# Altium PCB AB32VG1_Prougen_Circuit_V02.PcbDoc (part 2 of 3)
Units mm, origin at the board's own origin, x right, y up, seen from the top; angles counter-clockwise.
Board outline 90.13 x 60.13 mm, 4 copper layers (Top Layer, GND, POWER, Bottom Layer); 102 components, 91 nets, 357 pads, 386 vias.
Unrouted connection lines stored in the file: 1.
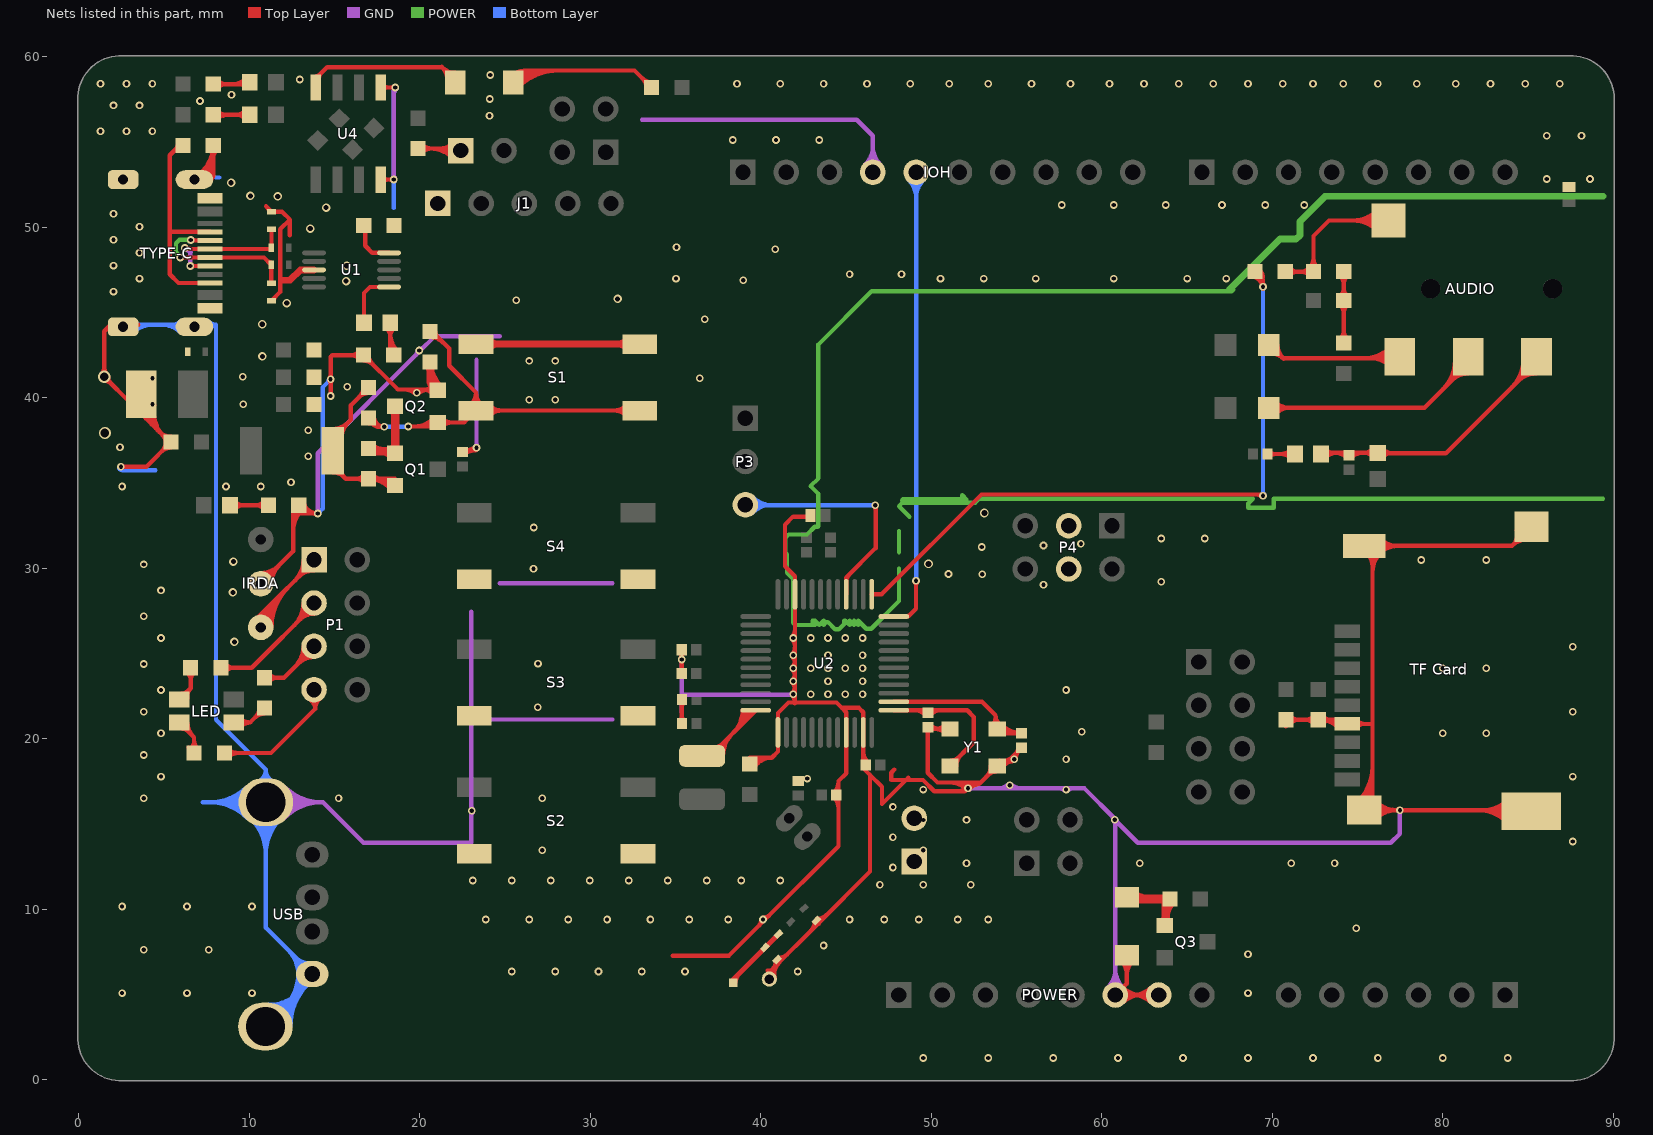
[diagram p4: the nets of this part, all layers, seen from the top]

## Via types
v1: diameter 0.45, hole 0.25, Top Layer to Bottom Layer, tented both sides, 359 vias
v2: diameter 0.5, hole 0.3, Top Layer to Bottom Layer, tented both sides, 14 vias
v3: diameter 0.508, hole 0.356, Top Layer to Bottom Layer, tented both sides, 7 vias
v4: diameter 0.711, hole 0.508, Top Layer to Bottom Layer, tented both sides, 6 vias

## Nets (pads, with @x,y where several pads share a name; then routed paths per layer and width w, separated by ;. In a path a pad name is that pad's centre, name@x,y a point inside that pad or via, vN(x,y) a via of type N, cw(c..) or ccw(c..) an arc to the next point about the centre after c; other vN are vias at no path point) (continued)
GND: "TF Card.6" "TF Card.10" BT-ANT1.2 C1.1 C2.1 C3.2 C4.2 C5.2 C6.1 C7.2 C10.2 C11.1 C12.2 C13.2 C14.2 C15.2 C16.2 C17.2 C18.2 C20.1 C21.1 CE1.2 D7.2 ED1.2 ED2.2 ED3.2 IOH.4 IRDA.2 J1.1 J2.2 J4.2 J19.1 J19.2 L2.1 L3.2 P4.3 P4.4 POWER.6 POWER.7 Q2.2 R2.1 R9.1 R10.1 R12.1 S1.1 S2.2 S3.2 S4.2 TYPE-C.A1 TYPE-C.A12 TYPE-C.B1 TYPE-C.B12 TYPE-C.GND U1.3 U2.13 U2.21 U2.23 U2.46 U4.4 U4.5 USB.4 USB.5 USB.6 Y1.2 Y1.4 | length 729.5
  Top Layer w0.254: v4@1.328,41.392 ccw(c0.938,41.782) 1.49,41.782 ccw(c2.042,41.782) v4@1.652,41.392 ; 1.489,43.899 cw(c1.908,43.479) TYPE-C.GND@2.174,44.009 ; v4@1.49,41.002 cw(c1.49,40.45) 1.88,40.84 cw(c2.27,41.23) v4@1.718,41.23 ; v1(2.47,35.96) 3.971,35.96 C12.2@5.411,37.4 5.32,37.4 3.093,39.627 v4(1.49,41.23) 1.49,43.9 1.87,44.28 2.6,44.28 3.5,44.28 ; v1@2.539,35.891 cw(c2.707,35.723) 2.707,35.96 cw(c2.707,36.197) v1@2.539,36.029 ; CE1.2@3.665,39.692 ccw(c4.714,39.511) 3.961,38.759 ; CE1.2@3.916,39.649 ccw(c5.305,39.409) 4.308,38.412 ; CE1.2@4.166,39.606 ccw(c5.897,39.307) 4.655,38.065 ; CE1.2@4.416,39.563 ccw(c6.488,39.205) C12.2@5.001,37.719 ; 4.714,38.006 ccw(c5.411,38.704) C12.2@5.411,37.717 ; 4.933,37.787 cw(c4.547,37.4) 5.094,37.4 cw(c4.327,37.4) 4.869,36.858 cw(c5.411,36.316) C12.2@5.411,37.082 ; TYPE-C.GND@7.072,53.135 ccw(c5.787,54.8) R9.1@7.89,54.8 ; TYPE-C.GND@7.227,52.934 ccw(c6.186,54.283) 7.89,54.283 ; TYPE-C.GND@7.382,52.733 ccw(c6.584,53.766) 7.89,53.766 ; TYPE-C.GND@7.537,52.532 ccw(c6.983,53.25) 7.89,53.25 ; TYPE-C.GND@7.564,52.666 7.89,52.992 R9.1@7.89,54.8 ; R9.1@7.665,54.575 cw(c7.123,54.033) 7.89,54.033 cw(c8.657,54.033) R9.1@8.115,54.575 ; R9.1@7.89,55 R9.1@7.89,54.8 ; IRDA.2@10.32,28.74 IRDA.2@10.673,29.093 12.572,30.992 12.572,33.21 12.9,33.21 ; IRDA.2@10.673,29.462 ccw(c10.673,30.353) 11.303,29.723 ccw(c11.933,29.093) IRDA.2@11.042,29.093 ; IRDA.2@10.673,29.716 ccw(c10.673,31.22) 11.737,30.157 ccw(c12.8,29.093) IRDA.2@11.296,29.093 ; 10.978,51.23 ED3.2@11.3,50.908 11.922,50.908 12.38,50.45 ; 11.083,51.125 cw(c10.866,50.908) ED3.2@11.173,50.908 ; ED2.2@11.262,45.73 ED2.2@11.3,45.692 11.81,46.202 11.81,49.88 12.38,50.45 ; ED2.2@11.427,45.692 cw(c11.734,45.692) 11.517,45.909 ; 12.38,49.53 12.38,50.45 ; 12.572,32.142 cw(c14.458,32.142) R10.1@13.125,33.475 ; 12.572,32.755 cw(c13.845,32.755) R10.1@12.945,33.655 ; R10.1@12.719,33.641 ccw(c13.312,33.833) 13.312,33.21 ; R10.1@12.9,33.7 13.39,33.21 ; R10.1@12.923,33.383 cw(c12.968,32.788) 13.39,33.21 ; R10.1@12.96,33.72 ccw(c13.661,33.946) 13.661,33.21 ; R10.1@13.202,33.798 ccw(c14.01,34.059) v1(14.01,33.21) 13.39,33.21 ; R10.1@13.217,33.677 ccw(c13.812,33.632) 13.39,33.21 ; v1@13.941,33.141 ccw(c13.773,32.973) 13.773,33.21 ccw(c13.773,33.447) v1@13.941,33.279 ; v1@14.701,40.169 ccw(c14.533,40.337) 14.77,40.337 ccw(c15.007,40.337) v1@14.839,40.169 ; v1@14.701,41.011 cw(c14.533,40.843) 14.77,40.843 cw(c15.007,40.843) v1@14.839,41.011 ; v1@14.701,41.149 ccw(c14.533,41.317) 14.77,41.317 ccw(c15.007,41.317) v1@14.839,41.149 ; v1(14.77,40.1) v1(14.77,41.08) 14.77,42.4 14.87,42.5 R2.1@16.7,42.5 18.716,40.484 19.829,40.484 21.016,40.484 Q2.2@21.05,40.484 ; R2.1@16.475,42.275 ccw(c15.933,41.733) 15.933,42.5 ccw(c15.933,43.267) R2.1@16.475,42.725 ; R2.1@16.7,42.182 cw(c16.7,41.416) 17.242,41.958 cw(c17.784,42.5) R2.1@17.017,42.5 ; U4.4@17.71,52.8 v1(18.48,52.8) ; U4.5@17.71,58.2 v1(18.56,58.2) ; U4.4@17.832,52.678 cw(c18.128,52.382) 18.128,52.8 cw(c18.128,53.218) U4.4@17.832,52.922 ; U4.5@17.832,58.078 cw(c18.128,57.782) 18.128,58.2 cw(c18.128,58.618) U4.5@17.832,58.322 ; v1@18.411,52.731 ccw(c18.243,52.563) 18.243,52.8 ccw(c18.243,53.037) v1@18.411,52.869 ; v1@18.491,58.131 ccw(c18.323,57.963) 18.323,58.2 ccw(c18.323,58.437) v1@18.491,58.269 ; 19.134,40.484 cw(c19.134,39.599) v1@19.76,40.225 ; v1@19.898,40.225 cw(c20.524,39.599) 20.524,40.484 ; 20.163,40.484 cw(c20.163,39.588) Q2.2@20.797,40.222 ; 20.327,40.484 ccw(c20.327,41.148) Q2.2@20.797,40.678 ; C13.2@22.511,36.907 23.286,36.907 v1(23.33,37.07) ; C13.2@22.647,36.703 cw(c23.141,36.209) 23.141,36.907 ; C13.2@22.7,36.907 ccw(c22.7,37.7) v1@23.261,37.139 ; 34.84,7.28 38.14,7.28 40.195,9.335 44.56,13.7 44.56,16.7 44.56,17.517 45.01,17.967 U2.21@45.01,20.37 45.01,21.56 44.76,21.81 ; C16.2@35.243,23.967 ccw(c34.947,24.263) 35.365,24.263 ccw(c35.783,24.263) C16.2@35.487,23.967 ; C15.2@35.243,25.073 cw(c34.947,24.777) 35.365,24.777 cw(c35.783,24.777) C15.2@35.487,25.073 ; C18.2@35.253,21.047 ccw(c34.981,21.319) 35.365,21.319 ; C17.2@35.253,22.153 cw(c34.981,21.881) 35.365,21.881 ; v1@35.291,24.581 cw(c35.111,24.401) 35.365,24.401 ; v1@35.291,24.719 ccw(c35.111,24.899) C15.2@35.365,24.899 ; C18.2@35.365,21.02 35.365,22.3 C17.2@35.365,22.42 ; 35.365,21.367 ccw(c35.817,21.367) C18.2@35.497,21.047 ; 35.365,21.833 cw(c35.817,21.833) C17.2@35.497,22.153 ; C16.2@35.365,23.82 35.365,24.65 C15.2@35.365,25.22 ; C11.1@39.2,18.613 cw(c39.712,18.279) C11.1@39.712,18.89 ; C11.1@39.36,18.89 40.65,18.89 ; C11.1@39.413,18.474 cw(c40.181,17.973) 40.181,18.89 ; C11.1@39.626,18.335 cw(c40.65,17.667) 40.65,18.89 ; 39.876,9.016 ccw(c39.493,9.398) v1@40.034,9.398 ; v1@40.132,9.496 ccw(c40.132,10.037) 40.514,9.654 ; 40.401,6.404 40.501,6.404 40.604,6.404 ; BT-ANT1.2@40.563,5.917 cw(c41.27,6.053) 40.761,6.561 ; 40.745,6.545 ccw(c40.433,6.856) L3.2@40.859,6.968 ; BT-ANT1.2@40.813,5.965 cw(c41.838,6.162) 41.1,6.9 40.604,6.404 ; L3.2@41.022,6.888 ccw(c41.022,7.046) 41.134,6.934 ; L3.2@41.022,7.142 ccw(c41.022,7.914) 41.568,7.368 ; 41.058,6.858 ccw(c40.929,6.987) L3.2@41.105,7.033 ; v1@41.841,22.537 cw(c41.453,22.151) 42,22.15 ; v1@41.841,23.299 cw(c41.451,22.91) 42.001,22.909 ; v1@41.841,24.061 cw(c41.448,23.669) 42.002,23.668 ; v1@41.841,24.823 cw(c41.445,24.428) 42.004,24.427 ; v1@41.841,25.839 cw(c41.441,25.44) 42.005,25.44 ; v1@41.841,22.675 ccw(c41.455,23.063) 42.002,23.062 ; v1@41.841,23.437 ccw(c41.452,23.827) 42.003,23.827 ; v1@41.841,24.199 ccw(c41.449,24.592) 42.004,24.591 ; v1@41.841,24.961 ccw(c41.446,25.357) 42.005,25.356 ; v1@41.841,25.977 ccw(c41.442,26.377) 42.007,26.376 ; 42,22.07 42,22.13 ; 42.932,8.732 ccw(c42.387,9.278) L2.1@43.158,9.278 ; J2.2@42.98,32.87 42.835,33.015 42.82,33.03 41.9,33.03 41.42,32.55 41.42,30.12 42.01,29.53 U2.46@42.01,28.47 42.006,25.908 42.004,24.892 42.003,24.13 42.002,23.368 42.001,22.606 42,22.13 ; L2.1@43.255,9.303 cw(c43.238,9.142) 43.4,9.142 ; L2.1@43.301,9.372 cw(c43.175,9.186) 43.4,9.186 ; L2.1@43.322,9.188 ccw(c43.322,9.346) 43.434,9.234 ; L2.1@43.322,9.442 ccw(c43.322,10.213) 43.868,9.668 ; 43.366,9.166 ccw(c43.254,9.278) L2.1@43.412,9.278 ; C7.2@44.303,16.553 cw(c43.681,15.931) 44.56,15.931 ; C7.2@44.303,16.847 ccw(c43.681,17.469) 44.56,17.469 ; 46.01,19.287 ccw(c46.957,19.287) C6.1@46.287,18.617 ; 47.835,18.195 47.65,18.01 47.65,17.58 48.52,17.58 ; 48.66,17.72 48.52,17.58 ; C2.1@49.678,20.553 cw(c49.382,20.257) 49.8,20.257 cw(c50.218,20.257) C2.1@49.922,20.553 ; C2.1@49.947,20.797 ccw(c50.49,21.34) 50.49,20.573 ; Y1.2@50.824,20.344 ccw(c50.273,19.793) 50.273,20.573 ccw(c50.273,21.352) Y1.2@50.824,20.801 ; 51.103,17.43 cw(c51.103,16.033) v1@52.091,17.021 ; Y1.2@51.103,20.573 49.902,20.573 C2.1@49.8,20.675 49.8,18 50.37,17.43 52.16,17.43 52.9,17.43 ; 51.513,16.92 ccw(c51.513,17.737) v1@52.091,17.159 ; 51.716,17.43 cw(c51.716,16.646) v1@52.27,17.2 ; v1@52.023,17.165 cw(c52.471,16.92) 52.471,17.43 ; v1@52.03,17.176 cw(c52.344,16.969) 52.344,17.345 ; v1@52.242,17.036 cw(c52.815,16.659) 52.815,17.345 ; v1@52.246,17.043 cw(c52.9,16.684) 52.9,17.43 ; v1@52.258,17.09 cw(c52.543,17.09) 52.341,17.291 ; 53.235,17.765 ccw(c52.598,18.402) Y1.4@53.499,18.402 ; 53.356,17.886 cw(c53.822,17.42) Y1.4@53.822,18.079 ; Y1.4@53.939,18.469 ccw(c54.066,18.964) 54.428,18.603 ; Y1.4@54.002,18.715 ccw(c54.195,19.465) v1@54.742,18.917 ; Y1.4@54.282,18.457 cw(c54.864,17.875) v1@54.864,18.698 ; v1@54.962,18.796 cw(c55.785,18.796) C1.1@55.203,19.378 ; 54.962,19.137 ccw(c54.624,19.475) C1.1@55.102,19.475 ; C1.1@55.022,19.197 cw(c55.275,18.945) C1.1@55.275,19.302 ; C1.1@55.3,19.475 v1@54.742,18.918 ; POWER.6@61.061,4.709 cw(c61.691,4.079) 61.691,4.97 ; POWER.6@61.061,5.231 ccw(c61.691,5.861) 61.691,4.97 ; D7.2@61.15,6.971 cw(c60.381,6.202) 61.468,6.202 ; POWER.6@61.241,4.529 cw(c62.304,3.466) 62.304,4.97 cw(c62.304,6.474) POWER.6@61.241,5.411 ; 61.468,6.124 cw(c62.665,6.124) D7.2@61.818,6.971 ; D7.2@61.468,7.215 61.468,5.638 POWER.6@60.8,4.97 POWER.7@63.34,4.97 ; POWER.7@62.899,4.529 ccw(c61.836,3.466) 61.836,4.97 ccw(c61.836,6.474) POWER.7@62.899,5.411 ; POWER.7@63.079,4.709 ccw(c62.449,4.079) 62.449,4.97 ccw(c62.449,5.861) POWER.7@63.079,5.231 ; C20.1@70.8,20.73 70.991,20.921 71.181,21.111 C21.1@72.7,21.111 74.159,21.111 74.4,20.87 75.87,20.87 75.88,20.88 ; C20.1@71.025,20.886 cw(c71.567,20.344) 71.567,21.111 cw(c71.567,21.878) C20.1@71.025,21.336 ; C21.1@72.475,20.886 ccw(c71.933,20.344) 71.933,21.111 ccw(c71.933,21.878) C21.1@72.475,21.336 ; C21.1@72.809,21.111 cw(c72.809,19.629) 73.857,20.677 ; C21.1@72.925,20.886 cw(c73.467,20.344) 73.467,21.111 cw(c73.467,21.878) C21.1@72.925,21.336 ; 73.422,21.111 cw(c73.422,20.242) 74.037,20.857 ; 74.943,20.677 cw(c75.409,20.211) 75.409,20.87 cw(c75.409,21.529) 74.943,21.063 ; 75.039,16.323 ccw(c73.008,18.354) 75.88,18.354 ; 75.218,16.144 ccw(c73.621,17.741) 75.88,17.741 ; 75.398,15.964 ccw(c74.234,17.128) 75.88,17.128 ; 75.545,30.907 cw(c74.736,30.098) 75.88,30.098 ; 75.88,16.761 ccw(c76.499,16.761) 76.061,16.323 ccw(c77.295,17.557) 77.295,15.812 ccw(c77.295,14.067) 76.061,15.301 ; 75.88,29.76 cw(c77.502,29.76) 76.355,30.907 cw(c77.333,29.929) 77.333,31.312 cw(c77.333,32.695) 76.355,31.717 ; 75.88,30.373 cw(c76.889,30.373) 76.176,31.086 cw(c76.72,30.542) 76.72,31.312 cw(c76.72,32.082) 76.176,31.538 ; 75.882,15.48 cw(c76.682,14.68) 76.682,15.812 cw(c76.682,16.944) 75.882,16.144 ; 77.249,15.812 cw(c77.249,15.569) v1@77.421,15.741 ; 77.258,15.812 ccw(c77.258,16.042) v1@77.421,15.879 ; v1@77.559,15.741 cw(c77.731,15.569) 77.731,15.812 ; v1@77.559,15.879 ccw(c77.722,16.042) 77.722,15.812 ; 82.03,15.812 cw(c82.03,13.221) 83.862,15.053 ; 82.372,15.812 ccw(c82.372,17.919) 83.862,16.429 ; 82.643,15.812 cw(c82.643,13.834) 84.042,15.233 ; 82.986,15.812 ccw(c82.986,17.305) 84.042,16.249 ; 83.256,15.812 cw(c83.256,14.447) 84.221,15.412 ; 84.354,32.238 cw(c83.482,32.001) 84.121,31.362 cw(c84.889,30.594) 85.012,31.673 ; 84.431,31.672 ccw(c83.969,32.133) 84.599,32.305 ; 84.493,31.734 cw(c84.965,31.262) 85.041,31.925 ; 85.2,15.741 85.129,15.812 77.49,15.812 75.4,15.812 75.88,16.292 75.88,20.88 ; 85.2,32.441 84.071,31.312 75.4,31.312 75.88,30.832 75.88,20.88 ; 12.9,33.21 ccw(c12.681,33.21) 12.77,33.41 cw(c12.681,33.21) 12.9,33.21 ; 12.9,33.21 cw(c13.119,33.21) 13.03,33.41 ccw(c13.119,33.21) 12.9,33.21 ; 12.9,33.21 13.39,33.21 ; 40.604,6.404 43.4,9.2 46.41,12.21 46.41,17.88 ; 40.65,18.89 41.01,19.25 U2.13@41.01,20.37 41.01,21.51 41.63,22.13 42,22.13 ; 42,22.13 44.44,22.13 44.76,21.81 ; 44.76,21.81 45.76,21.81 46.01,21.56 U2.23@46.01,20.37 46.01,18.47 46.01,18.28 46.41,17.88 ; 46.41,17.88 47.11,17.18 47.11,16.17 48.52,17.58 ; 48.52,17.58 49.52,17.58 50.18,16.92 51.97,16.92 52.15,17.1 52.395,17.345 52.815,17.345 ; 52.815,17.345 52.9,17.43 ; 52.9,17.43 Y1.4@53.872,18.402 54.227,18.402 v1@54.742,18.918
  Top Layer w0.4: 11.881,46.899 12.391,46.899 12.992,47.5 U1.3@13.8,47.5 ; R12.1@20.427,41.927 cw(c20.01,41.51) 20.6,41.51 cw(c21.19,41.51) R12.1@20.773,41.927 ; 20.6,41.114 ccw(c21.689,41.114) Q2.2@20.919,40.344 ; R12.1@20.6,42.08 ccw(c22.655,42.08) Q2.2@21.202,40.627 ; R12.1@20.6,42.1 20.6,40.9 21.016,40.484 Q2.2@21.05,40.45 ; S1.1@23.3,43.15 S1.1@32.9,43.15 ; S1.1@24.007,42.887 cw(c24.641,42.253) 24.641,43.15 cw(c24.641,44.047) S1.1@24.007,43.413 ; S1.1@32.193,42.887 ccw(c31.559,42.253) 31.559,43.15 ccw(c31.559,44.047) S1.1@32.193,43.413
  GND w0.254: USB.5@10.969,16.273 14.327,16.273 16.7,13.9 23.028,13.9 23.028,15.771 23.028,27.456 ; USB.5@11.709,15.732 cw(c13.015,14.426) 13.015,16.273 cw(c13.015,18.12) USB.5@11.709,16.814 ; USB.5@11.889,15.552 cw(c13.629,13.813) 13.629,16.273 cw(c13.629,18.733) USB.5@11.889,16.994 ; USB.5@12.069,15.373 cw(c14.242,13.2) 14.242,16.273 cw(c14.242,19.346) USB.5@12.069,17.173 ; v1@13.941,33.279 ccw(c13.773,33.447) 14.01,33.447 ccw(c14.247,33.447) v1@14.079,33.279 ; v1(14.01,33.21) 14.01,36.75 20.004,42.744 20.86,43.6 24.7,43.6 ; v1@18.411,52.869 ccw(c18.243,53.037) 18.48,53.037 ccw(c18.717,53.037) v1@18.549,52.869 ; v1(18.48,52.8) 18.48,58.12 v1(18.56,58.2) ; 18.48,57.77 cw(c18.99,57.77) v1@18.629,58.131 ; 19.755,42.495 ccw(c19.474,42.777) v1@19.872,42.777 ; v1@19.97,42.875 ccw(c19.97,43.273) 20.252,42.992 ; 23.028,15.467 cw(c23.36,15.467) v1@23.125,15.702 ; 23.028,16.075 ccw(c23.36,16.075) v1@23.125,15.84 ; 23.036,21.128 31.304,21.128 ; v1@23.261,37.139 ccw(c23.093,37.307) 23.33,37.307 ccw(c23.567,37.307) v1@23.399,37.139 ; v1(23.33,37.07) 23.33,42.23 ; 24.7,29.128 31.304,29.128 ; 33.04,56.31 45.63,56.31 46.576,55.364 IOH.4@46.576,53.23 ; v1@35.291,24.581 cw(c35.099,24.389) 35.37,24.389 ; v1(35.36,24.65) 35.37,24.64 35.37,22.64 ; 35.37,21.56 35.37,22.64 ; 41.611,22.58 ccw(c41.611,22.905) v1@41.841,22.675 ; v1@42.01,22.58 41.91,22.58 35.43,22.58 35.37,22.64 ; IOH.4@46.135,53.671 ccw(c45.072,54.734) 46.576,54.734 ccw(c48.08,54.734) IOH.4@47.017,53.671 ; IOH.4@46.315,53.491 ccw(c45.685,54.121) 46.576,54.121 ccw(c47.467,54.121) IOH.4@46.837,53.491 ; v1@52.229,17.021 cw(c52.397,16.853) 52.397,17.09 cw(c52.397,17.327) v1@52.229,17.159 ; 53.934,17.09 ccw(c53.934,17.948) v1@54.541,17.341 ; v1@54.61,17.09 v1(52.16,17.09) 57.912,17.09 58.99,17.09 60.8,15.28 60.8,15.25 v1@60.8,15.22 ; v1@54.679,17.341 ccw(c55.286,17.948) 55.286,17.09 ; 57.502,17.09 cw(c57.502,16.608) v1@57.843,16.949 ; v1@57.981,16.949 cw(c58.322,16.608) 58.322,17.09 ; POWER.6@60.359,5.411 ccw(c59.296,6.474) 60.8,6.474 ccw(c62.304,6.474) POWER.6@61.241,5.411 ; POWER.6@60.539,5.231 ccw(c59.909,5.861) 60.8,5.861 ccw(c61.691,5.861) POWER.6@61.061,5.231 ; 60.56,15.52 cw(c60.291,15.25) v1@60.672,15.25 ; v1@60.701,15.181 cw(c60.461,14.941) 60.8,14.941 ; v1@60.77,15.152 cw(c60.77,14.915) 60.937,15.083 cw(c61.105,15.25) v1@60.868,15.25 ; v1(60.77,15.25) v1@60.8,15.22 ; POWER.6@60.8,4.97 v1@60.8,15.22 ; v1@77.421,15.741 cw(c77.253,15.573) 77.49,15.573 cw(c77.727,15.573) v1@77.559,15.741 ; v1(77.49,15.81) 77.49,14.43 76.96,13.9 62.12,13.9 v1@60.8,15.22
  POWER w0.254: 48.11,29.987 48.11,28.08 46.482,26.452 46.192,26.452 45.72,26.924 45.72,26.67 45.466,26.924 45.466,26.67 45.212,26.924 45.212,26.67 44.958,26.924 44.894,26.924 44.894,26.734 44.576,26.416 44.374,26.416 43.94,26.85 43.868,26.85 43.688,26.67 43.688,26.924 43.434,26.67 43.18,26.924 43.034,26.924 43.034,26.816 43.18,26.67 42.03,26.67 41.89,26.81 41.89,29.377 41.537,29.73 41.537,30.83 41.44,30.927 41.44,31.786 41.634,31.98 42.71,31.98 43.168,32.438 43.348,32.438 43.38,32.47 43.38,34.363 42.926,34.817 43.38,35.271 43.38,43.126 46.504,46.25 67.4,46.25 67.4,46.24 67.62,46.24 67.723,46.343 67.493,46.343 ; 48.11,30.935 48.11,32.187 ; 48.73,33.02 48.11,33.64 48.32,33.85 52.07,33.85 ; 51.816,34.036 51.816,34.29 52.07,34.036 52.07,33.85 ; 89.408,34.08 70.089,34.08 70.089,33.543 68.595,33.543 68.595,33.797 68.878,34.08 52.808,34.08 52.578,33.85 52.07,33.85
  POWER w0.3: 48.305,33.985 48.356,34.036 51.816,34.036
  POWER w0.4: 67.493,46.343 70.457,49.307 71.405,49.307 71.628,49.53 71.628,50.348 73.096,51.816 89.408,51.816
  Bottom Layer w0.254: v1@2.36,35.85 ccw(c2.622,36.112) 2.622,35.741 ; v1(2.47,35.96) 2.689,35.741 4.5,35.741 ; v1@2.539,36.029 ccw(c3.235,36.725) 3.235,35.741 ; TYPE-C.GND@3.069,44.041 cw(c3.648,43.462) 3.648,44.28 ; TYPE-C.GND@3.249,43.861 cw(c4.261,42.849) 4.261,44.28 ; TYPE-C.GND@3.249,44.459 ccw(c3.682,44.892) 3.682,44.28 ; 3.5,44.28 6.78,44.28 8.05,44.28 ; 4.919,44.28 cw(c4.919,42.849) TYPE-C.GND@5.931,43.861 ; 5.498,44.28 ccw(c5.498,44.892) TYPE-C.GND@5.931,44.459 ; 5.532,44.28 cw(c5.532,43.462) TYPE-C.GND@6.11,44.041 ; 7.268,16.273 USB.5@10.969,16.273 ; TYPE-C.GND@7.632,44.456 ccw(c8.05,44.864) 8.05,44.28 ; TYPE-C.GND@7.737,44.044 cw(c8.05,43.954) 8.05,44.28 ; 8.05,52.92 8.239,52.92 ; USB.5@9.868,15.373 ccw(c7.695,13.2) 7.695,16.273 ccw(c7.695,19.346) USB.5@9.868,17.173 ; USB.5@10.048,15.552 ccw(c8.308,13.813) 8.308,16.273 ccw(c8.308,18.733) USB.5@10.048,16.994 ; USB.5@10.068,15.373 cw(c7.895,13.2) 10.969,13.2 cw(c14.042,13.2) USB.5@11.869,15.373 ; USB.5@10.228,15.732 ccw(c8.922,14.426) 8.922,16.273 ccw(c8.922,18.12) USB.5@10.228,16.814 ; USB.5@10.248,15.552 cw(c8.508,13.813) 10.969,13.813 cw(c13.429,13.813) USB.5@11.689,15.552 ; USB.5@10.428,15.732 cw(c9.122,14.426) 10.969,14.426 cw(c12.815,14.426) USB.5@11.509,15.732 ; USB.5@10.474,17.446 ccw(c10.16,18.191) 10.969,18.191 ; USB.5@10.573,17.212 ccw(c10.321,17.809) 10.969,17.809 ccw(c11.616,17.809) USB.5@11.365,17.212 ; USB.6@10.944,3.123 13.694,5.873 USB.4@13.694,6.198 10.969,8.923 USB.5@10.969,16.273 ; USB.6@11.144,3.888 ccw(c11.144,5.252) 12.108,4.288 ; USB.6@11.144,4.142 ccw(c11.144,6.119) 12.542,4.721 ; USB.6@11.144,4.396 ccw(c11.144,6.986) 12.975,5.155 ; USB.5@11.463,17.446 cw(c11.778,18.191) 10.969,18.191 ; USB.6@11.655,3.123 cw(c13.371,3.123) 12.157,4.337 ; USB.6@11.909,3.123 cw(c14.238,3.123) 12.591,4.77 ; 12.055,4.234 ccw(c10.091,6.198) 12.868,6.198 ccw(c10.875,6.198) 12.284,7.607 ; USB.6@12.163,3.123 cw(c15.105,3.123) 13.025,5.204 ; USB.6@12.417,3.123 cw(c15.973,3.123) USB.4@13.458,5.638 ; 12.488,4.668 ccw(c10.958,6.198) 13.122,6.198 ccw(c11.742,6.198) 12.718,7.174 ; 12.613,16.273 USB.5@10.969,16.273 ; 12.744,7.147 ccw(c13.503,7.906) USB.4@13.503,6.833 ; 12.922,5.101 ccw(c11.825,6.198) USB.4@13.376,6.198 ; v1(14.01,33.21) 14.3,33.5 14.3,40.61 v1(14.77,41.08) ; v1@14.01,33.308 ccw(c14.01,33.545) 14.177,33.377 ccw(c14.345,33.21) v1@14.108,33.21 ; v1@14.672,41.08 cw(c14.435,41.08) 14.603,40.913 cw(c14.77,40.745) v1@14.77,40.982 ; v1@18.411,52.731 cw(c18.243,52.563) 18.48,52.563 cw(c18.717,52.563) v1@18.549,52.731 ; v1@18.411,52.869 ccw(c18.243,53.037) 18.48,53.037 ccw(c18.717,53.037) v1@18.549,52.869 ; 18.48,51.13 v1(18.48,52.8) 18.48,58.12 v1(18.56,58.2) ; 18.48,57.77 cw(c18.99,57.77) v1@18.629,58.131 ; 8.05,44.28 8.05,21.11 10.969,18.191 ; USB.5@10.969,16.273 10.969,18.191
  other v1: 49.53,1.27 53.34,1.27 57.15,1.27 60.96,1.27 64.77,1.27 68.58,1.27 72.39,1.27 76.2,1.27 80.01,1.27 83.82,1.27 2.54,5.08 6.35,5.08 10.16,5.08 68.58,5.08 25.4,6.35 27.94,6.35 30.48,6.35 33.02,6.35 35.56,6.35 42.164,6.35 68.58,7.366 3.81,7.62 7.62,7.62 43.688,7.874 74.93,8.89 23.876,9.398 26.416,9.398 28.702,9.398 30.988,9.398 33.528,9.398 35.814,9.398 38.1,9.398 40.132,9.398 45.212,9.398 47.244,9.398 49.276,9.398 51.562,9.398 53.34,9.398 2.54,10.16 6.35,10.16 10.16,10.16 46.99,11.43 49.53,11.43 52.324,11.43 23.114,11.684 25.4,11.684 27.686,11.684 29.972,11.684 32.258,11.684 34.544,11.684 36.83,11.684 38.862,11.684 41.148,11.684 47.752,12.446 52.07,12.7 62.23,12.7 71.12,12.7 73.66,12.7 27.178,13.462 49.53,13.462 87.63,13.97 47.752,14.224 49.53,15.24 52.07,15.24 23.056,15.771 47.752,16.002 3.81,16.51 15.24,16.51 27.178,16.51 49.53,17.018 57.912,17.018 54.61,17.272 42.733,17.663 4.826,17.78 87.63,17.78 54.864,18.796 57.912,18.796 3.81,19.05 4.826,20.32 80.01,20.32 82.55,20.32 58.833,20.413 3.81,21.59 87.63,21.59 26.924,21.844 41.91,22.606 42.926,22.606 43.942,22.606 44.958,22.606 45.974,22.606 4.826,22.86 57.912,22.86 41.91,23.368 43.942,23.368 45.974,23.368 41.91,24.13 42.926,24.13 43.942,24.13 44.958,24.13 45.974,24.13 80.01,24.13 82.55,24.13 3.81,24.384 26.934,24.408 41.91,24.892 43.942,24.892 45.974,24.892 87.63,25.4 4.826,25.908 41.91,25.908 42.926,25.908 43.942,25.908 44.958,25.908 45.974,25.908 3.81,27.178 4.826,28.702 56.582,29.027 63.5,29.21 52.994,29.645 51.015,29.667 26.67,29.972 3.81,30.226 78.74,30.48 82.55,30.48 52.966,31.243 56.582,31.339 58.78,31.442 63.5,31.75 66.04,31.75 26.687,32.388 2.54,34.798 8.636,34.798 10.668,34.798 12.446,35.052 13.462,36.576 2.416,37.094 13.462,38.1 4.318,39.624 9.652,39.624 26.416,39.878 27.94,39.878 19.829,40.294 15.748,40.64 4.318,41.148 36.42,41.14 9.621,41.234 26.416,42.164 27.94,42.164 19.97,42.777 36.72,44.6 25.654,45.72 2.032,46.228 38.98,46.9 3.556,46.99 35.03,46.99 50.546,46.99 53.086,46.99 56.134,46.99 60.706,46.99 65.024,46.99 67.31,46.99 45.212,47.244 48.26,47.244 2.032,47.752 3.556,48.514 40.85,48.71 35.06,48.83 2.032,49.276 3.556,50.038 2.032,50.8 57.658,51.308 60.706,51.308 63.754,51.308 67.056,51.308 69.596,51.308 71.882,51.308 86.106,52.832 88.646,52.832 38.354,55.118 40.894,55.118 43.434,55.118 86.106,55.372 88.138,55.372 1.27,55.626 2.794,55.626 4.318,55.626 24.092,56.543 2.032,57.15 3.556,57.15 7.112,57.404 24.109,57.528 8.952,57.773 1.27,58.42 2.794,58.42 4.318,58.42 38.608,58.42 41.148,58.42 43.688,58.42 46.228,58.42 48.768,58.42 51.054,58.42 53.34,58.42 55.88,58.42 58.166,58.42 60.452,58.42 62.484,58.42 64.516,58.42 66.548,58.42 68.58,58.42 70.612,58.42 72.39,58.42 74.168,58.42 76.2,58.42 78.486,58.42 80.772,58.42 82.804,58.42 84.836,58.42 86.868,58.42 12.954,58.674 24.13,58.928
  other v2: 9.129,25.677 9.034,28.58 9.065,30.395 10.772,42.432 10.761,44.313 12.2,45.555 31.602,45.796 15.682,46.843 15.714,47.747 13.578,49.924 14.502,51.152 11.672,51.813 10.062,51.837 8.93,52.611
  other v3: 49.842,30.257 53.118,33.242
  other v4: 1.531,37.931
IRDA: IRDA.1 P1.1 | length 16.5
  Top Layer w0.254: IRDA.1@10.302,26.902 IRDA.1@10.673,27.273 ; IRDA.1@10.534,26.532 cw(c11.989,26.532) 10.96,27.56 ; IRDA.1@10.673,26.532 IRDA.1@10.673,27.273 ; IRDA.1@10.788,26.532 cw(c12.856,26.532) 11.394,27.994 ; IRDA.1@11.042,26.532 cw(c13.723,26.532) 11.827,28.427 ; IRDA.1@11.296,26.532 cw(c14.591,26.532) 12.261,28.861 ; 12.666,29.266 ccw(c11.432,30.5) P1.1@13.177,30.5 ; 12.907,29.507 cw(c13.8,28.614) P1.1@13.8,29.877 ; 13.099,29.699 ccw(c12.299,30.5) P1.1@13.431,30.5 ; P1.1@13.86,30.46 13.85,30.45 IRDA.1@10.673,27.273
LED-B: P1.5 R20.1 | length 8.7
  Top Layer w0.254: R20.1@10.9,23.578 12.038,23.578 13.84,25.38 P1.5@13.86,25.4 ; R20.1@11.125,23.353 cw(c11.667,22.811) 11.667,23.578 cw(c11.667,24.345) R20.1@11.125,23.803 ; 12.68,24.22 ccw(c11.48,25.42) P1.5@13.177,25.42 ; 12.873,24.413 cw(c13.8,23.486) P1.5@13.8,24.797 ; 13.114,24.654 ccw(c12.347,25.42) P1.5@13.431,25.42 ; 13.307,24.847 cw(c13.8,24.353) P1.5@13.8,25.051
LED-G: P1.7 R18.1 | length 9.8
  Top Layer w0.254: R18.1@8.54,19.16 11.271,19.16 13.86,21.749 P1.7@13.86,22.5 ; R18.1@8.765,18.935 cw(c9.307,18.393) 9.307,19.16 cw(c9.307,19.927) R18.1@8.765,19.385 ; P1.7@13.509,22.329 cw(c13.202,21.747) 13.86,21.747 cw(c14.658,21.747) P1.7@14.176,22.383
LED-R: P1.3 R17.1 | length 12
  Top Layer w0.254: R17.1@8.34,24.16 10.143,24.16 13.86,27.877 13.86,27.96 P1.3@13.86,28.3 ; R17.1@8.565,23.935 cw(c9.107,23.393) 9.107,24.16 cw(c9.107,24.927) R17.1@8.565,24.385 ; 12.635,26.652 ccw(c11.328,27.96) P1.3@13.177,27.96 ; 12.981,26.998 cw(c13.8,26.178) P1.3@13.8,27.337 ; 13.069,27.086 ccw(c12.195,27.96) P1.3@13.431,27.96
LX: L4.1 U2.12 | length 10.1
  Top Layer w0.254: L4.1@36.56,18.99 37.03,18.99 U2.12@39.71,21.67 ; L4.1@37.275,19.498 ccw(c37.275,20.133) 37.724,19.684 ; L4.1@37.529,18.99 cw(c38.734,18.99) 37.882,19.842 ; L4.1@37.783,18.99 cw(c39.601,18.99) 38.315,20.275 ; 38.39,20.35 ccw(c37.071,21.67) U2.12@38.937,21.67 ; 38.824,20.784 ccw(c37.938,21.67) U2.12@39.191,21.67 ; 39.258,21.218 ccw(c38.805,21.67) U2.12@39.445,21.67 ; U2.12@39.691,21.651 ccw(c39.672,21.67) U2.12@39.699,21.67
MICIN: C23.1 U2.37 | length 43.7
  Top Layer w0.254: U2.37@46.51,28.47 47.09,28.47 52.95,34.33 69.39,34.33 v1(69.46,34.26) ; C23.1@68.913,47.091 cw(c68.751,46.401) v1@69.46,46.401 ; C23.1@68.971,47.338 cw(c68.826,46.721) v1@69.46,46.721 ; C23.1@68.986,47.4 69.46,46.926 ; C23.1@69.017,47.084 cw(c69.072,46.538) 69.46,46.926 ; C23.1@69.03,47.585 cw(c68.902,47.042) 69.46,47.042 ; 69.054,34.33 cw(c69.054,33.854) v1@69.391,34.191 ; C23.1@69.302,47.369 ccw(c69.848,47.314) 69.46,46.926 ; v1@69.391,46.589 ccw(c69.223,46.757) 69.46,46.757 ccw(c69.697,46.757) v1@69.529,46.589 ; v1(69.46,46.52) 69.46,46.926
  Bottom Layer w0.254: v1@69.391,34.329 ccw(c69.223,34.497) 69.46,34.497 ccw(c69.697,34.497) v1@69.529,34.329 ; v1@69.391,46.451 cw(c69.223,46.283) 69.46,46.283 cw(c69.697,46.283) v1@69.529,46.451 ; v1(69.46,34.26) v1(69.46,46.52)
MICR: P3.3 U2.40 | length 18.3
  Top Layer w0.254: U2.40@45.01,28.47 45.01,29.45 46.74,31.18 v1@46.74,33.66 ; U2.40@45.023,29.23 cw(c45.586,29.23) 45.188,29.628 ; v1@46.651,33.631 cw(c46.435,33.415) 46.74,33.415
  Bottom Layer w0.254: P3.3@39.1,33.7 v1(46.72,33.7) ; P3.3@39.361,33.459 cw(c39.943,32.877) 39.943,33.7 ; P3.3@39.361,33.981 ccw(c40.039,34.659) 40.039,33.7 ; P3.3@39.541,33.279 cw(c40.556,32.264) 40.556,33.7 ; P3.3@39.541,34.161 ccw(c40.652,35.272) 40.652,33.7 ; v1@46.651,33.631 ccw(c46.483,33.463) 46.483,33.7 ccw(c46.483,33.937) v1@46.651,33.769
NetAUDIO_1: AUDIO.1 C26.1 L5.2 L6.1 | length 25.2
  Top Layer w0.254: L5.2@72.87,36.7 72.94,36.77 74.5,36.77 L6.1@76.2,36.77 ; L5.2@73.109,36.486 cw(c73.795,35.8) 73.795,36.77 ; L5.2@73.109,36.964 ccw(c73.577,37.432) 73.577,36.77 ; 73.707,36.77 cw(c73.707,35.857) C26.1@74.353,36.503 ; C26.1@74.647,36.503 cw(c75.293,35.857) 75.293,36.77 ; L6.1@75.936,36.531 ccw(c75.359,35.954) 75.359,36.77 ccw(c75.359,37.586) L6.1@75.936,37.009 ; L6.1@76.2,36.47 76.35,36.62 76.47,36.74 80.18,36.74 85.16,41.72 AUDIO.1@85.16,42.29 ; L6.1@76.464,36.531 cw(c76.969,36.026) 76.969,36.74 ; L6.1@76.464,37.009 ccw(c77.113,37.658) 77.113,36.74 ; 84.081,40.641 ccw(c82.523,42.2) AUDIO.1@84.727,42.2 ; 84.419,40.979 cw(c85.5,39.899) AUDIO.1@85.5,41.427 ; 84.515,41.075 ccw(c83.39,42.2) AUDIO.1@84.981,42.2 ; AUDIO.1@84.853,41.413 cw(c85.5,40.766) AUDIO.1@85.5,41.681
NetAUDIO_2: AUDIO.2 C22.2 | length 21.2
  Top Layer w0.254: C22.2@69.8,39.42 78.93,39.42 81.16,41.65 AUDIO.2@81.16,42.29 ; C22.2@69.98,39.22 cw(c70.461,38.739) 70.461,39.42 ; C22.2@70.159,39.041 cw(c71.075,38.125) 71.075,39.42 ; C22.2@70.159,39.759 ccw(c70.978,40.578) 70.978,39.42 ; 80.032,40.522 ccw(c78.354,42.2) AUDIO.2@80.727,42.2 ; 80.466,40.956 ccw(c79.221,42.2) AUDIO.2@80.981,42.2 ; 80.539,41.029 cw(c81.5,40.068) AUDIO.2@81.5,41.427 ; AUDIO.2@80.899,41.389 ccw(c80.088,42.2) AUDIO.2@81.235,42.2 ; AUDIO.2@80.973,41.463 cw(c81.5,40.935) AUDIO.2@81.5,41.681
NetAUDIO_3: AUDIO.3 C24.2 | length 15.1
  Top Layer w0.254: C24.2@69.526,43.164 69.8,43.164 69.832,43.132 70.644,42.32 AUDIO.3@77.135,42.32 ; C24.2@69.821,42.847 cw(c69.87,42.257) C24.2@70.289,42.676 ; C24.2@69.842,42.594 cw(c69.929,41.541) 70.676,42.288 ; C24.2@70.308,43.1 ccw(c71.38,43.1) 70.622,42.342 ; 75.416,42.32 ccw(c75.416,44.459) AUDIO.3@76.928,42.947 ; 75.802,42.32 cw(c75.802,40.727) AUDIO.3@76.928,41.853 ; 76.029,42.32 ccw(c76.029,43.846) AUDIO.3@77.108,42.767 ; 76.415,42.32 cw(c76.415,41.34) AUDIO.3@77.108,42.033
NetAUDIO_4: AUDIO.4 C23.2 R16.2 | length 17.8
  Top Layer w0.254: C23.2@70.725,47.4 C23.2@70.764,47.4 R16.2@72.422,47.4 72.422,49.492 73.33,50.4 AUDIO.4@76.825,50.4 ; C23.2@70.989,47.175 cw(c71.531,46.633) 71.531,47.4 cw(c71.531,48.167) C23.2@70.989,47.625 ; R16.2@72.197,47.175 ccw(c71.655,46.633) 71.655,47.4 ccw(c71.655,48.167) 72.197,47.625 ccw(c71.655,48.167) 72.422,48.167 ccw(c73.189,48.167) R16.2@72.647,47.625 ; AUDIO.4@76.208,49.783 ccw(c74.717,48.292) 74.717,50.4 ccw(c74.717,52.508) AUDIO.4@76.208,51.017 ; AUDIO.4@76.387,49.962 ccw(c75.33,48.906) 75.33,50.4 ccw(c75.33,51.894) AUDIO.4@76.387,50.838
NetBT-ANT1_1: BT-ANT1.1 L1.2 L3.1 | length 4.5
  Top Layer w0.293: BT-ANT1.1@38.4,5.9 40.25,7.75 L1.2@41.041,8.541 ; BT-ANT1.1@38.503,5.7 cw(c39.236,5.7) 38.718,6.218
  Top Layer w0.299: BT-ANT1.1@38.4,5.7 BT-ANT1.1@38.4,5.9
NetC14_1: C14.1 U1.10 | length 2.9
  Top Layer w0.254: C14.1@16.8,50.2 16.8,50.1 16.8,48.913 17.213,48.5 U1.10@18.2,48.5
NetC19_2: C19.2 R15.1 R16.1 | length 8.6
  Top Layer w0.254: C19.2@73.975,43.434 ccw(c73.433,43.976) 74.2,43.976 ccw(c74.967,43.976) C19.2@74.425,43.434 ; R15.1@73.975,45.475 cw(c73.433,44.933) 74.2,44.933 cw(c74.967,44.933) R15.1@74.425,45.475 ; R15.1@73.975,45.925 ccw(c73.433,46.467) 74.2,46.467 ccw(c74.967,46.467) R15.1@74.425,45.925 ; R16.1@73.975,47.175 cw(c73.433,46.633) 74.2,46.633 cw(c74.967,46.633) R16.1@74.425,47.175 ; C19.2@74.2,43.59 R15.1@74.2,45.7 R16.1@74.2,47.4
NetC25_2: C25.2 L5.1 | length 3.5
  Top Layer w0.254: C25.2@69.725,36.7 L5.1@71.33,36.7 ; C25.2@69.847,36.578 cw(c70.143,36.282) 70.143,36.7 cw(c70.143,37.118) C25.2@69.847,36.822 ; L5.1@71.091,36.461 ccw(c70.514,35.884) 70.514,36.7 ccw(c70.514,37.516) L5.1@71.091,36.939
NetD1_A: D1.A U1.6 | length 3.4
  Top Layer w0.254: D1.A@16.73,44.4 16.73,46.149 17.081,46.5 U1.6@18.2,46.5
NetD1_K: D1.K R2.2 | length 5.1
  Top Layer w0.254: D1.K@18.031,44.136 cw(c17.454,43.559) 18.27,43.559 cw(c19.086,43.559) D1.K@18.509,44.136 ; 18.27,43.155 ccw(c19.133,43.155) R2.2@18.523,42.545 ; 18.27,43.769 ccw(c19.747,43.769) R2.2@18.703,42.725 ; D1.K@18.27,44.4 18.27,42.708 R2.2@18.478,42.5
NetD2_A: D2.A R5.1 | length 7.1
  Top Layer w0.254: R5.1@7.89,56.6 8.4,56.6 ; R5.1@7.931,56.552 cw(c8.189,56.251) 8.469,56.531 ; R5.1@7.932,56.552 cw(c8.189,56.261) 8.464,56.536 ; R5.1@8.115,56.375 cw(c8.637,55.853) 8.637,56.592 ; R5.1@8.115,56.825 ccw(c8.676,57.386) 8.676,56.592 ; R5.1@8.17,56.45 cw(c8.408,56.321) 8.408,56.592 ; R5.1@8.175,56.46 cw(c8.4,56.349) 8.4,56.6 ; R5.1@8.175,56.74 ccw(c8.4,56.851) 8.4,56.6 ; R5.1@8.176,56.738 ccw(c8.408,56.849) 8.408,56.592 ; 9.195,56.592 ccw(c9.195,57.435) D2.A@9.791,56.839 ; 9.233,56.592 cw(c9.233,55.803) D2.A@9.791,56.361 ; D2.A@10.03,56.9 9.88,56.75 9.722,56.592 8.408,56.592 ; 8.4,56.6 8.408,56.592
NetD3_A: D3.A R6.1 | length 4.5
  Top Layer w0.254: R6.1@8,58.386 D3.A@10.03,58.386 ; R6.1@8.115,58.175 cw(c8.623,57.667) 8.623,58.386 ; R6.1@8.115,58.625 ccw(c8.69,59.2) 8.69,58.386 ; 8.999,58.386 ccw(c8.999,59.506) D3.A@9.791,58.714 ; 9.429,58.386 cw(c9.429,57.874) D3.A@9.791,58.236
NetD4_2: D4.2 Q1.2 R7.1 R8.1 | length 19.7
  Top Layer w0.254: D4.2@14.9,35.627 cw(c14.9,34.703) 15.554,35.356 ; D4.2@14.9,38.173 ccw(c14.9,39.435) 15.793,38.543 ; D4.2@15.405,36.013 ccw(c16.096,35.826) 15.59,35.32 ; D4.2@15.423,37.65 cw(c16.687,37.65) 15.793,38.543 ; R7.1@16.682,40.6 cw(c15.916,40.6) 16.458,40.058 cw(c17,39.516) R7.1@17,40.283 ; R8.1@16.775,35.025 ccw(c16.233,34.483) 16.233,35.25 ccw(c16.233,36.017) R8.1@16.775,35.475 ; R7.1@17,40.6 15.96,39.56 15.96,38.71 14.9,37.65 D4.2@14.9,36.9 14.9,36.01 15.66,35.25 R8.1@17,35.25 ; R8.1@17.225,35.025 cw(c17.767,34.483) 17.767,35.25 cw(c17.767,36.017) R8.1@17.225,35.475 ; 17.536,35.25 cw(c17.536,34.041) Q1.2@18.472,34.806 ; 18.072,35.25 cw(c18.072,34.479) Q1.2@18.668,34.967 ; Q1.2@18.275,34.646 ccw(c17,33.603) R8.1@17,35.25 ; Q1.2@18.55,35.25 R8.1@17,35.25
NetD5_K: D5.K R10.2 | length 4.7
  Top Layer w0.254: D5.K@8.87,33.7 R10.2@11.122,33.7 ; D5.K@9.109,33.461 cw(c9.686,32.884) 9.686,33.7 cw(c9.686,34.516) D5.K@9.109,33.939 ; R10.2@10.897,33.475 ccw(c10.355,32.933) 10.355,33.7 ccw(c10.355,34.467) R10.2@10.897,33.925
NetD6_1: D6.2 R21.1 | length 18.3
  Top Layer w0.254: D6.2@25.281,58.788 cw(c26.274,57.795) 26.274,59.2 ; D6.2@25.46,58.609 cw(c26.888,57.181) 26.888,59.2 ; D6.2@25.607,59.041 ccw(c25.766,59.635) 26.201,59.2 ; D6.2@25.64,58.429 cw(c27.501,56.568) 27.501,59.2 ; D6.2@25.7,58.699 26.201,59.2 ; D6.2@25.819,58.25 cw(c28.114,55.955) 28.114,59.2 ; D6.2@25.958,58.594 cw(c26.788,58.613) 26.201,59.2 ; R21.1@33.282,58.2 ccw(c32.516,58.2) 33.058,58.742 ccw(c33.6,59.284) R21.1@33.6,58.518 ; R21.1@33.6,58.2 32.6,59.2 26.201,59.2
NetD6_2: D6.1 U4.8 | length 11.7
  Top Layer w0.254: U4.8@13.9,58.2 13.9,58.726 14.568,59.394 21.303,59.394 D6.1@22.065,58.632 ; U4.8@13.9,58.848 ccw(c13.9,59.143) U4.8@14.108,58.934 ; U4.8@14.073,58.675 cw(c14.614,58.675) 14.231,59.057 ; 21.289,59.408 cw(c20.508,58.627) D6.1@21.612,58.597 ; 21.325,59.372 ccw(c22.085,60.131) D6.1@22.085,59.057
NetD7_1: D7.1 Q3.1 R19.1 | length 7.4
  Top Layer w0.5: D7.1@61.684,10.615 61.699,10.6 63.754,10.6 63.754,9.144 63.68,9.07 Q3.1@63.5,8.89 ; D7.1@61.831,10.458 cw(c62.175,10.114) D7.1@62.175,10.6 ; D7.1@61.831,10.952 ccw(c62.682,11.803) 62.682,10.6 ; Q3.1@63.584,9.191 ccw(c63.172,9.603) 63.754,9.603 ; 63.754,9.537 cw(c65.063,9.537) R19.1@64.138,10.462 ; R19.1@63.862,10.462 ccw(c63.53,10.13) 63.53,10.6 ccw(c63.53,11.07) R19.1@63.862,10.738
NetED2_1: ED2.1 R11.1 TYPE-C.A7 TYPE-C.B7 | length 11.3
  Top Layer w0.254: v1(5.953,48.23) TYPE-C.A7@7.695,48.23 8.89,48.23 ; v1@6.022,48.161 cw(c6.19,47.993) 6.19,48.23 cw(c6.19,48.467) v1@6.022,48.299 ; v1(6.559,49.257) 6.531,49.23 6.559,49.23 TYPE-C.B7@7.695,49.23 ; v1@6.628,49.327 ccw(c6.862,49.56) 6.862,49.23 ; 8.675,48.23 8.89,48.23 ; 11.075,48.017 ccw(c11.292,48.234) R11.1@11.292,47.927 ; ED2.1@11.3,46.708 11.292,46.716 R11.1@11.292,47.8 10.862,48.23 8.89,48.23
  POWER w0.254: 5.74,48.508 cw(c5.462,48.23) v1@5.855,48.23 ; v1(5.953,48.23) 5.953,48.295 5.706,48.542 5.706,49.062 5.908,49.264 6.413,49.264 6.447,49.23 6.531,49.23 v1(6.559,49.257) ; 6.306,49.264 cw(c6.306,49.005) v1@6.49,49.188
NetED3_1: ED3.1 R13.1 TYPE-C.A6 TYPE-C.B6 | length 10.3
  Top Layer w0.254: v1(6.215,48.785) 6.16,48.73 6.215,48.73 TYPE-C.A6@7.695,48.73 11.222,48.73 R13.1@11.292,48.8 11.3,48.808 ED3.1@11.3,49.892 ; v1@6.284,48.854 ccw(c6.584,49.155) 6.584,48.73 ; v1(6.537,47.73) TYPE-C.B6@7.695,47.73 ; v1@6.606,47.661 cw(c6.774,47.493) 6.774,47.73 cw(c6.774,47.967) v1@6.606,47.799
  GND w0.254: v1@6.215,48.687 cw(c6.215,48.194) 6.563,48.543 ; v1(6.215,48.785) 6.16,48.73 6.215,48.73 6.376,48.73 6.537,48.569 v1(6.537,47.73) ; v1@6.468,47.799 ccw(c6.3,47.967) 6.537,47.967 ccw(c6.774,47.967) v1@6.606,47.799
NetJ3_1: J3.1 R4.2 | length 7.3
  Top Layer w0.254: R4.2@19.7,54.622 R4.2@19.9,54.622 22.278,54.622 J3.1@22.4,54.5 ; R4.2@20.125,54.397 cw(c20.667,53.855) 20.667,54.622 cw(c20.667,55.389) R4.2@20.125,54.847 ; 20.601,54.622 cw(c20.601,52.701) J3.1@21.959,54.059 ; 21.19,54.622 ccw(c21.19,55.71) J3.1@21.959,54.941 ; 21.215,54.622 cw(c21.215,53.315) J3.1@22.139,54.239
NetLED_2: LED.2 R20.2 | length 4.6
  Top Layer w0.254: LED.2@9.1,20.95 10.05,20.95 ; LED.2@9.474,20.707 cw(c10.05,20.146) 10.05,20.95 ; LED.2@9.474,21.193 ccw(c10.05,21.754) 10.05,20.95 ; R20.2@10.583,21.8 cw(c9.816,21.8) 10.358,21.258 cw(c10.9,20.716) R20.2@10.9,21.482 ; R20.2@10.9,21.8 10.05,20.95
NetLED_3: LED.3 R18.2 | length 5.1
  Top Layer w0.254: LED.3@5.9,20.95 6.762,20.088 R18.2@6.762,19.16 R18.2@6.44,19.482 ; LED.3@6.025,20.602 cw(c6.025,20.064) 6.406,20.444 ; LED.3@6.373,20.947 ccw(c7.488,20.939) 6.699,20.151 ; R18.2@6.537,19.385 ccw(c5.995,19.927) 6.762,19.927 ccw(c7.529,19.927) R18.2@6.987,19.385
NetLED_4: LED.4 R17.2 | length 4.4
  Top Layer w0.254: LED.4@5.9,22.3 6.562,22.962 ; LED.4@6.025,22.648 ccw(c6.025,23.186) 6.406,22.806 ; R17.2@6.337,23.935 cw(c5.795,23.393) 6.562,23.393 cw(c7.329,23.393) R17.2@6.787,23.935 ; LED.4@6.368,22.357 cw(c7.052,22.471) 6.562,22.962 ; R17.2@6.562,24.16 6.562,22.962
NetQ1_1: Q1.1 Q2.3 R8.2 | length 7.1
  Top Layer w0.254: Q1.1@18.27,36.87 18.35,36.95 Q1.1@18.55,37.15
  Top Layer w0.5: R8.2@17,37.028 17.158,36.87 Q1.1@18.27,36.87 ; R8.2@17.138,37.166 ccw(c17.851,37.879) 17.851,36.87 ; 17.752,36.87 cw(c17.752,35.977) Q1.1@18.384,36.609 ; Q1.1@18.409,36.891 ccw(c18.067,37.233) 18.55,37.233 ccw(c19.033,37.233) Q1.1@18.691,36.891 ; Q2.3@18.409,39.359 cw(c18.067,39.017) 18.55,39.017 cw(c19.033,39.017) Q2.3@18.691,39.359 ; Q1.1@18.55,37.15 Q2.3@18.55,39.5
NetQ2_1: Q2.1 R7.2 R12.2 S1.2 | length 36.3
  Top Layer w0.254: R7.2@17.01,38.505 cw(c17.031,37.815) 17.519,38.303 ; R7.2@17.022,38.8 R7.2@17,38.822 ; R7.2@17.063,38.827 ccw(c17.635,38.877) 17.635,38.303 ; R7.2@17.178,39 R7.2@17,38.822 ; R7.2@17.316,38.849 ccw(c17.912,38.901) v1(17.912,38.303) 17.519,38.303 ; R7.2@17.317,38.812 ccw(c18.007,38.791) 17.519,38.303 ; v1@17.843,38.234 ccw(c17.675,38.066) 17.675,38.303 ccw(c17.675,38.54) v1@17.843,38.372 ; v1(19.322,38.316) 20.816,38.316 Q2.1@21.05,38.55 22.6,38.55 S1.2@23.3,39.25 ; v1@19.391,38.247 cw(c19.559,38.079) 19.559,38.316 cw(c19.559,38.553) v1@19.391,38.385 ; 19.68,38.316 ccw(c19.68,39.895) Q2.1@20.797,38.778 ; 20.293,38.316 ccw(c20.293,39.282) Q2.1@20.976,38.599 ; R12.2@20.6,43.56 cw(c20.6,42.463) 21.376,43.239 ; R12.2@20.6,43.878 20.737,43.878 21.725,42.89 21.725,41.882 23.3,40.307 ; R12.2@20.917,43.878 ccw(c21.353,43.878) 21.045,43.57 ; Q2.1@21.303,38.322 cw(c21.855,37.77) 21.855,38.55 cw(c21.855,39.33) Q2.1@21.303,38.778 ; S1.2@22.989,39.568 ccw(c22.266,40.307) 23.3,40.307 ; S1.2@23.611,39.568 cw(c24.334,40.307) 23.3,40.307 ; S1.2@24.059,38.936 cw(c24.818,38.177) 24.818,39.25 cw(c24.818,40.323) S1.2@24.059,39.564 ; S1.2@32.141,38.936 ccw(c31.382,38.177) 31.382,39.25 ccw(c31.382,40.323) S1.2@32.141,39.564 ; S1.2@32.9,39.25 S1.2@23.3,39.25 ; R7.2@17,38.822 17.519,38.303 ; S1.2@23.3,39.25 23.3,40.307
  Bottom Layer w0.254: v1(17.912,38.303) 19.309,38.303 v1(19.322,38.316) ; v1@17.981,38.234 cw(c18.149,38.066) 18.149,38.303 cw(c18.149,38.54) v1@17.981,38.372 ; 19.054,38.303 ccw(c19.054,38.584) v1@19.253,38.385
NetR9_2: R9.2 TYPE-C.A5 TYPE-C.B5 | length 13.8
  Top Layer w0.254: 5.662,54.552 cw(c6.107,54.108) R9.2@6.112,54.737 ; R9.2@5.713,54.603 ccw(c5.516,54.8) R9.2@5.795,54.8 ; R9.2@6.11,55 6.011,54.901 5.334,54.224 5.334,49.69 ; TYPE-C.B5@7.695,46.73 5.848,46.73 5.334,47.244 5.334,49.69 ; TYPE-C.A5@7.695,49.73 6.764,49.73 6.757,49.736 6.361,49.736 6.354,49.73 5.374,49.73 5.334,49.69
OSCI: C2.2 U2.25 Y1.3 | length 11.8
  Top Layer w0.254: U2.25@48.64,21.67 U2.25@47.81,21.67 49.8,21.67 52.11,21.67 52.5,21.28 52.5,19.799 Y1.3@51.103,18.402 ; 49.007,21.67 cw(c49.007,20.757) C2.2@49.653,21.403 ; C2.2@49.947,21.403 cw(c50.593,20.757) 50.593,21.67 ; Y1.3@51.153,18.725 ccw(c51.153,19.384) 51.619,18.918 ; Y1.3@51.476,18.402 cw(c52.376,18.402) 51.74,19.039
OSCO: C1.2 U2.26 Y1.1 | length 12.7
  Top Layer w0.254: U2.26@47.81,22.17 52.974,22.17 53.77,21.374 ; Y1.1@53.593,20.801 ccw(c53.167,21.227) 53.77,21.227 ; Y1.1@53.77,20.37 53.77,20.573 53.77,21.374 ; Y1.1@53.872,20.573 54.119,20.325 C1.2@55.3,20.325 cw(c55.299,21.95) Y1.1@54.15,20.801 ; Y1.1@53.971,20.621 ccw(c54.686,21.337) 54.686,20.325 ; Y1.1@54.029,20.82 cw(c54.492,21.374) 53.77,21.374 ; C1.2@55.153,20.203 ccw(c54.857,19.907) 54.857,20.325 ccw(c54.857,20.743) C1.2@55.153,20.447
PA0: IOH.5 U2.36 | length 31.6
  Top Layer w0.254: U2.36@47.81,27.17 48.65,27.17 49.11,27.63 v1(49.11,29.26) ; U2.36@48.57,27.183 ccw(c48.57,27.408) 48.729,27.249 ; v1@49.041,29.191 cw(c48.873,29.023) 49.11,29.023 cw(c49.347,29.023) v1@49.179,29.191
  Bottom Layer w0.254: IOH.5@48.675,52.789 cw(c47.612,51.726) 49.116,51.726 cw(c50.62,51.726) IOH.5@49.557,52.789 ; IOH.5@48.855,52.969 cw(c48.225,52.339) 49.116,52.339 cw(c50.007,52.339) IOH.5@49.377,52.969 ; v1@49.041,29.329 ccw(c48.859,29.511) 49.116,29.511 ; v1@49.116,29.26 IOH.5@49.116,53.23